# Altium PCB Taillight.PcbDoc
Units mil, origin at the board's own origin, x right, y up, seen from the top; angles counter-clockwise.
Board outline 3819 x 1417.5 mil, 2 copper layers (Top Layer, Bottom Layer), stack 61.8 mil thick; 20 components, 18 nets, 46 pads, 8 vias.
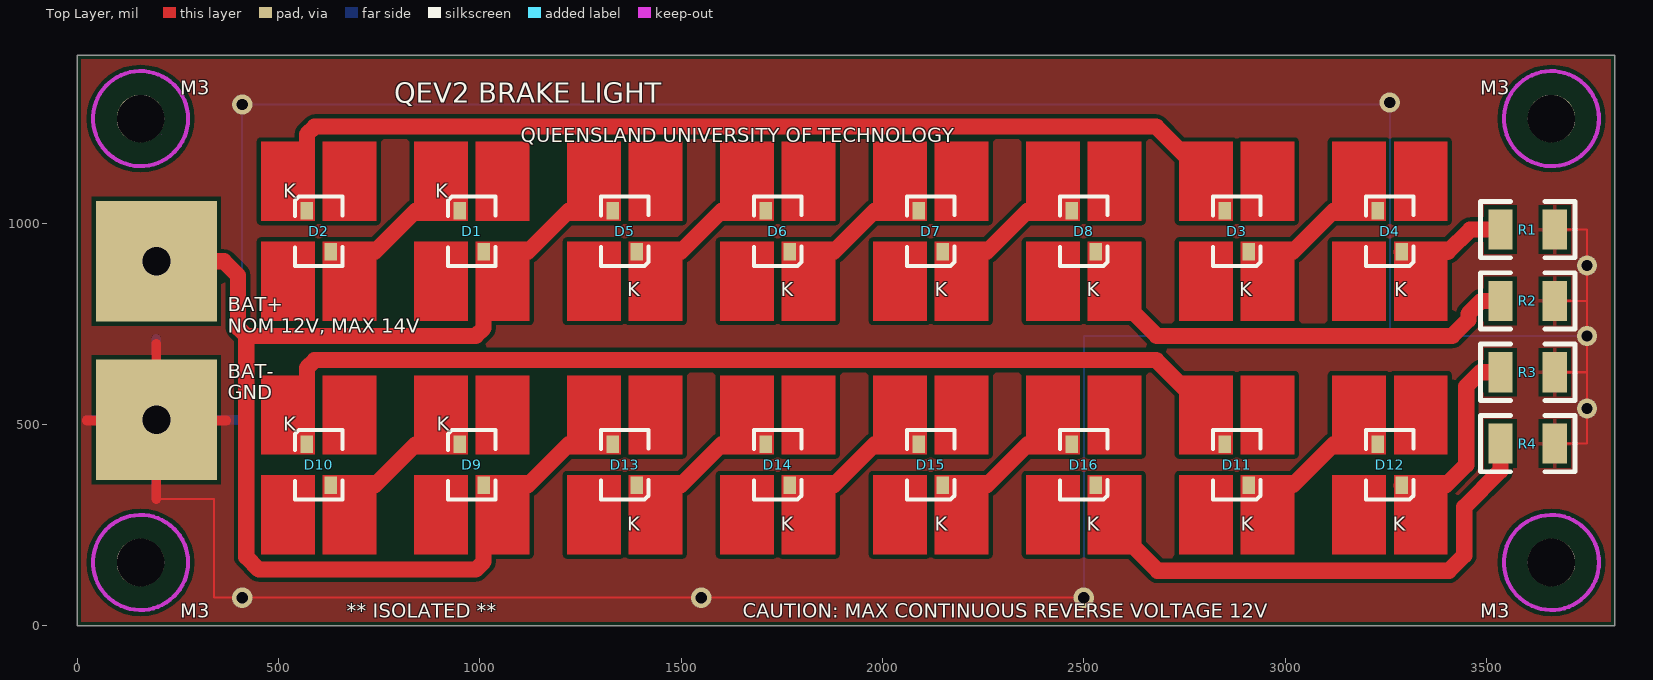
[diagram p0: Top Layer view]
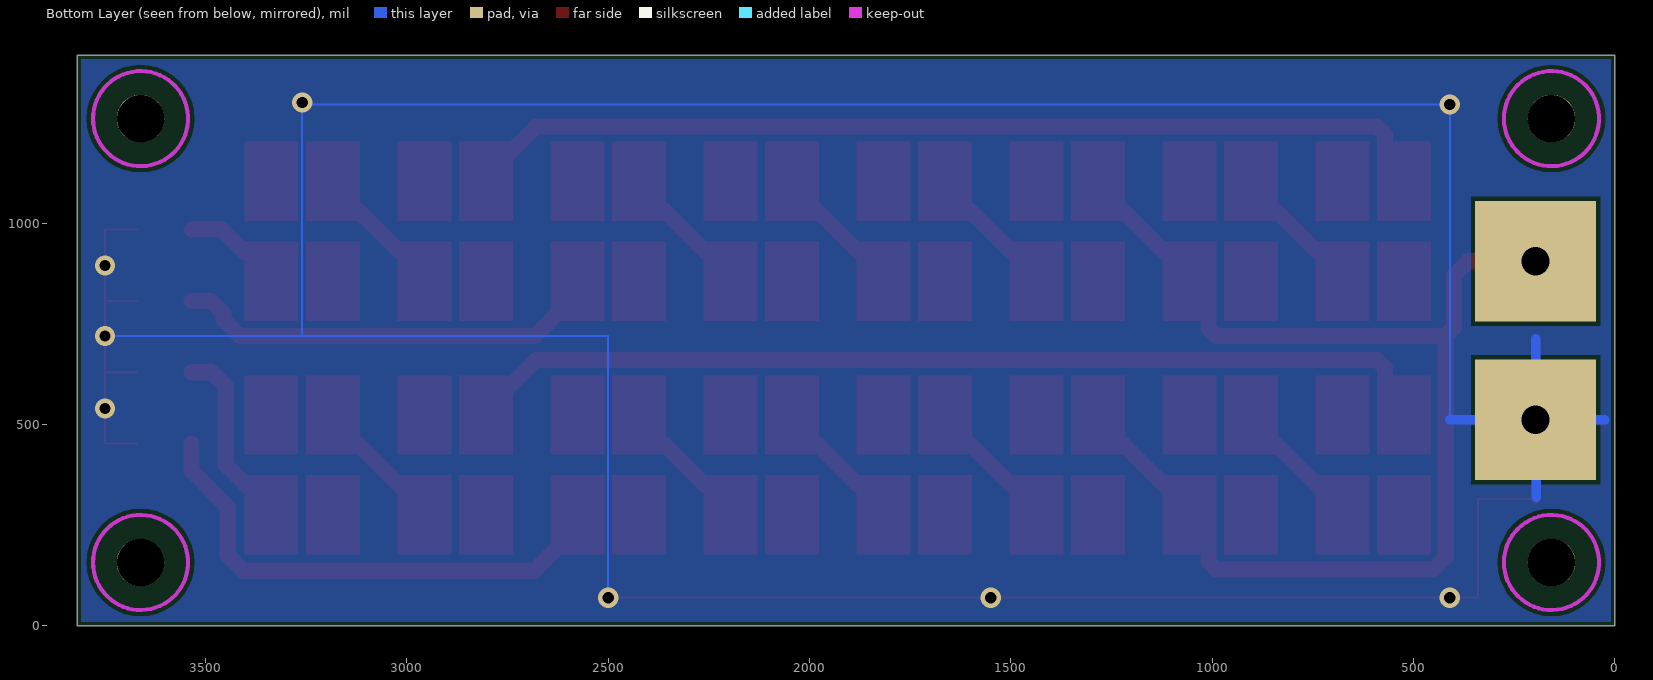
[diagram p1: Bottom Layer view, seen from below]
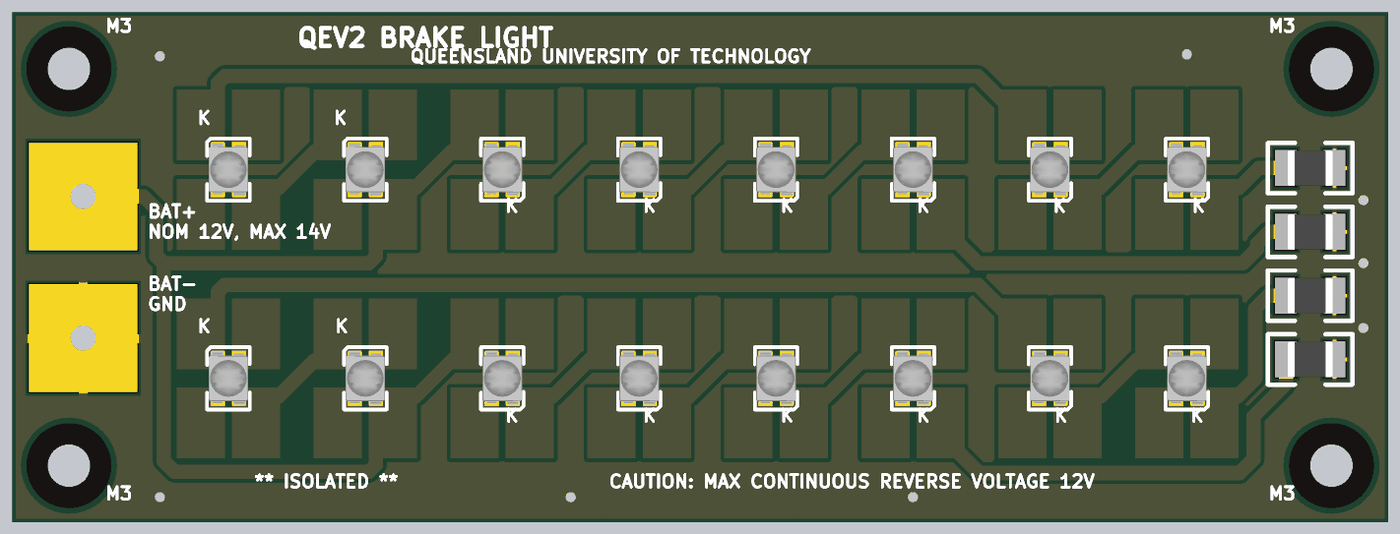
[diagram p2: 3D render of the assembled board from above, using the file's embedded part models]

## Layer stack, top to bottom
Top Solder: solder mask 0.4, Solder Resist, Dk 3.5
Top Layer: signal copper 1.4
Dielectric 1: core 59, Core-043, Dk 4.3
Bottom Layer: signal copper 1.4
Bottom Solder: solder mask 0.4, Solder Resist, Dk 3.5

## Board outline
0,0 3819,0 3819,1417.5 0,1417.5
cut-out: 210,1219.96

## Design rules (kind name [scope] priority, off if disabled: settings)
BoardOutlineClearance [All] p1: gap=10 ignorepadtopadclearanceinfootprint=FALSE except(0: Arc-SplitContinuation Track-SplitContinuation SMDPad-SplitContinuation THPad-SplitContinuation Via-SplitContinuation Fill-SplitContinuation Poly-SplitContinuation Region-SplitContinuation Text-SplitContinuation)
Clearance [All] p1: gap=10 ignorepadtopadclearanceinfootprint=FALSE except(0: Arc-Hole Track-Hole SMDPad-Hole THPad-Hole Via-Hole Fill-Hole Poly-Hole Region-Hole Text-Hole)
HoleSize [All] p1: absolutevalues=TRUE maxlimit=120 minlimit=1 maxpercent=80.000 minpercent=20.000
PolygonConnect PolygonConnect_1 [All] p1: thpad.connectstyle=Relief thpad.reliefconductorwidth=10 thpad.reliefentries=4 thpad.polygonreliefangle="90 Angle" thpad.airgapwidth=10 smdpad.connectstyle=Relief smdpad.reliefconductorwidth=10 smdpad.reliefentries=4 smdpad.polygonreliefangle="90 Angle" smdpad.airgapwidth=10 via.connectstyle=Direct via.reliefconductorwidth=10 via.reliefentries=4 via.polygonreliefangle="90 Angle" via.airgapwidth=10
PolygonConnect [All] p2: connectstyle=Relief reliefconductorwidth=10 reliefentries=4 polygonreliefangle="90 Angle" airgapwidth=10
RoutingVias [All] p1: holewidth=28 width=50 viastyle="Through Hole" minholewidth=28 minwidth=50 maxholewidth=28 maxwidth=50
SilkToSilkClearance [All] p1 off: silktosilkclearance=10
SilkToSolderMaskClearance [IsPad] p1 off: minsilkscreentomaskgap=10 clearancetoexposedcopper=TRUE
SolderMaskExpansion [All] p1: expansion=4 istentingtop=FALSE
Width Power [InNet('+12V')] p1: maxlimit=100 minlimit=24 preferedwidth=60 minimp=50.000000 maximp=50.000000 favimp=50.000000
Width Ground [InNet('GND')] p2: maxlimit=100 minlimit=5 preferedwidth=5 minimp=50.000000 maximp=50.000000 favimp=50.000000
Width [All] p3: maxlimit=60 minlimit=24 preferedwidth=40 minimp=50.000000 maximp=50.000000 favimp=50.000000
27 further rules are at their usual default settings.

## Classes and differential pairs
component class Taillight: D1 D2 D3 D4 D5 D6 D7 D8 D9 D10 D11 D12 D13 D14 D15 D16

## Components (designator, comment, footprint, x,y, rotation, side; value= is the part's Value field where it differs from the comment)
D1 "LED1" PLCC-4-1-LED 980,980 r180 top
D2 "LED1" PLCC-4-1-LED 600,980 r180 top
D3 "LED1" PLCC-4-1-LED 2880,980 r0 top
D4 "LED1" PLCC-4-1-LED 3260,980 r0 top
D5 "LED1" PLCC-4-1-LED 1360,980 r0 top
D6 "LED1" PLCC-4-1-LED 1740,980 r0 top
D7 "LED1" PLCC-4-1-LED 2120,980 r0 top
D8 "LED1" PLCC-4-1-LED 2500,980 r0 top
D9 "LED1" PLCC-4-1-LED 980,400 r180 top
D10 "LED1" PLCC-4-1-LED 600,400 r180 top
D11 "LED1" PLCC-4-1-LED 2880,400 r0 top
D12 "LED1" PLCC-4-1-LED 3260,400 r0 top
D13 "LED1" PLCC-4-1-LED 1360,400 r0 top
D14 "LED1" PLCC-4-1-LED 1740,400 r0 top
D15 "LED1" PLCC-4-1-LED 2120,400 r0 top
D16 "LED1" PLCC-4-1-LED 2500,400 r0 top
R1 "Comment" 1210 3602.36,984.25 r0 top
R2 "Comment" 1210 3602.36,807.09 r0 top
R3 "Comment" 1210 3602.36,629.92 r0 top
R4 "Comment" 1210 3602.36,452.76 r0 top

## Footprints (in the part's own frame and the unit in brackets; to place one, negate y for a bottom-side part, rotate by r counter-clockwise, add the part's x,y. Pads: shape width x height; smd on the part's side, far side on the other; paste and mask are expansions set on the pad)
1210 [mil]
  rect 60x100 smd: 1(-67.5,0) 2(67.5,0)
  silkscreen extent -118,-70 118,70, body extent -63,-49 63,49, height 30
PLCC-4-1-LED [mm]
  rect 0.8x1.1 smd: 1(-0.75,1.3) 2(0.75,-1.3)
  Top Layer region: 3.65,-0.65 0.25,-0.65 0.25,-5.65 3.65,-5.65
  Top Layer region: -0.25,-0.65 -3.65,-0.65 -3.65,-5.65 -0.25,-5.65
  Top Layer region: -3.65,0.65 -0.25,0.65 -0.25,5.65 -3.65,5.65
  Top Layer region: 0.25,0.65 3.65,0.65 3.65,5.65 0.25,5.65
  silkscreen extent -1.5,-2.2 1.5,2.2, body extent -1.4,-1.75 1.4,1.75, height 3.68

## Part data
D1 D2 D3 D4 D5 D6 D7 D8 D9 D10 D11 D12 D13 D14 D15 D16: "LS E63F-DBFA-1 Red Topled", LatestRevisionDate=08-Jul-2005, LatestRevisionNote="Mech Layer 1 removed.", PackageDescription="LED; 2 Leads", PackageReference=LED-1, Published=8-Jun-2000, Publisher="Altium Limited"
R1 R2 R3 R4: library part Res3, "Resistor"

## Free pads (board coordinates)
  rect 300x300 hole 70: 11(196.85,905.51) 12(196.85,511.81)
  round 118.11 hole 118.11 unplated mask+59.06: 12(157.48,157.48) 12(157.48,1259.84) 12(3661.42,157.48) 12(3661.42,1259.84)

## Via types
v1: diameter 50, hole 28, Top Layer to Bottom Layer, tented both sides, 8 vias

## Nets (pads, with @x,y where several pads share a name; then routed paths per layer and width w, separated by ;. In a path a pad name is that pad's centre, name@x,y a point inside that pad or via, vN(x,y) a via of type N, cw(c..) or ccw(c..) an arc to the next point about the centre after c; other vN are vias at no path point)
+12V: D1.1 D5.1 D9.1 D13.1 pad.11 | length 3238.2
  Top Layer w40: pad.11 364.49,905.51 400,870 400,740 420,720 ; D13.1 1221.18,451.18 1118.82,348.82 D9.1 1009.53,159.53 990,140 451.43,140 420,171.43 420,720 ; D5.1 1221.18,1031.18 1118.82,928.82 D1.1 1009.53,739.53 990,720 420,720
GND: pad.12@196.85,511.81 R1.2 R2.2 R3.2 R4.2 | length 11070.1
  Top Layer w5: 196.85,315 340,315 340,70 v1(410,70) v1(1550,70) v1(2500,70) ; R4.2 3750,452.76 v1(3750,540) 3750,630 ; R3.2 3749.92,629.92 3750,630 ; R2.2 3749.59,807.09 3750,807.5 ; R1.2 3750,984.25 v1(3750,895) 3750,807.5 ; 3750,630 v1(3750,720) 3750,807.5
  Top Layer w24: 23.7,510 pad.12@196.85,510 ; 196.85,315 pad.12@196.85,510 ; pad.12@196.85,511.81 196.85,700 ; 370,510 pad.12@196.85,510
  Bottom Layer w5: 410,511.81 v1(410,1295) 3255,1295 v1(3260,1300) 3260,720 ; v1(2500,70) 2500,720 3260,720 ; v1(3750,720) 3260,720
  Bottom Layer w24: 25,511.81 pad.12@195.04,511.81 ; 195.04,320 pad.12@195.04,511.81 ; pad.12@195.04,546.81 pad.12@195.04,511.81 ; pad.12@196.81,500 pad.12@196.81,511.81 ; 196.81,713.15 pad.12@196.81,511.81 ; pad.12@196.85,511.81 410,511.81 ; pad.12@195.04,511.81 pad.12@196.81,511.81
NetD1_2: D1.2 D2.1 | length 363.3
  Top Layer w40: D2.1 738.82,928.82 841.18,1031.18 D1.2
NetD2_2: D2.2 D3.1 | length 2586.3
  Top Layer w40: D2.2 570.47,1220.47 590,1240 2680,1240 2850.47,1069.53 D3.1
NetD3_2: D3.2 D4.1 | length 363.3
  Top Layer w40: D3.2 3018.82,928.82 3121.18,1031.18 D4.1
NetD4_2: D4.2 R1.1 | length 268.3
  Top Layer w40: D4.2 3403.82,928.82 3459.25,984.25 R1.1
NetD5_2: D5.2 D6.1 | length 363.3
  Top Layer w40: D5.2 1498.82,928.82 1601.18,1031.18 D6.1
NetD6_2: D6.2 D7.1 | length 363.3
  Top Layer w40: D6.2 1878.82,928.82 1981.18,1031.18 D7.1
NetD7_2: D7.2 D8.1 | length 363.3
  Top Layer w40: D7.2 2258.82,928.82 2361.18,1031.18 D8.1
NetD8_2: D8.2 R2.1 | length 1170.1
  Top Layer w40: D8.2 2529.53,871.73 2681.26,720 3415,720 3455,760 3455,775 3487.09,807.09 R2.1
NetD9_2: D9.2 D10.1 | length 362.4
  Top Layer w40: D10.1 738.82,348.82 840,450 D9.2@950,450
NetD10_2: D10.2 D11.1 | length 2587.3
  Top Layer w40: D10.2 570.47,640.47 590,660 2680,660 2850,490 D11.1@2850,450
NetD11_2: D11.2 D12.1 | length 362.4
  Top Layer w40: D11.2@2910,350 3020,350 3121.18,451.18 D12.1
NetD12_2: D12.2 R3.1 | length 476
  Top Layer w40: D12.2 3398.82,348.82 3450,400 3450,595 3484.92,629.92 R3.1
NetD13_2: D13.2 D14.1 | length 363.3
  Top Layer w40: D13.2 1498.82,348.82 1601.18,451.18 D14.1
NetD14_2: D14.2 D15.1 | length 363.3
  Top Layer w40: D14.2 1878.82,348.82 1981.18,451.18 D15.1
NetD15_2: D15.2 D16.1 | length 363.3
  Top Layer w40: D15.2 2258.82,348.82 2361.18,451.18 D16.1
NetD16_2: D16.2 R4.1 | length 1368.2
  Top Layer w40: D16.2 2529.53,290.47 2683.15,136.85 3406.85,136.85 3445,175 3445,295 3534.86,384.86 R4.1

## Polygon pours and split planes (outlines as drawn)
GND on Bottom Layer "GND_L02_P008" (solid, remove dead copper, pour order 8): 0,0 0,1417.32 3818.9,1417.32 3818.9,0
GND on Top Layer "GND_L01_P000" (solid, remove dead copper, pour order 0): 0,0 0,1417.32 3818.9,1417.32 3818.9,0

## Keep-outs
Keep-Out Layer:
  circle w10: c157.48,157.48 r118.11
  circle w10: c157.48,1259.84 r118.11
  circle w10: c3661.42,1259.84 r118.11
  circle w10: c3661.42,157.48 r118.11

## Silkscreen, mask and mechanical layers (free items; w line width, h text height)
Top Overlay:
  text "M3" at 255.91,1318.9 h35
  text "M3" at 3484.25,1318.9 h35
  text "QEV2 BRAKE LIGHT" at 787.4,1299.21 h50
  text "QUEENSLAND UNIVERSITY OF TECHNOLOGY" at 1102.36,1200.79 h35
  text "K" at 511.81,1062.99 h35
  text "K" at 889.76,1062.99 h35
  text "K" at 1366.14,818.9 h35
  text "K" at 1748.03,818.9 h35
  text "K" at 2129.92,818.9 h35
  text "K" at 2507.87,818.9 h35
  text "K" at 2885.83,818.9 h35
  text "K" at 3271.65,818.9 h35
  text "BAT+ / NOM 12V, MAX 14V" at 374.02,728.35 h35
  text "BAT- / GND" at 374.02,562.99 h35
  text "K" at 511.81,484.25 h35
  text "K" at 893.7,484.25 h35
  text "K" at 1366.14,236.22 h35
  text "K" at 1748.03,236.22 h35
  text "K" at 2129.92,236.22 h35
  text "K" at 2507.87,236.22 h35
  text "K" at 2889.76,236.22 h35
  text "K" at 3267.72,236.22 h35
  text "M3" at 255.91,19.68 h35
  text "** ISOLATED **" at 669.29,19.68 h35
  text "CAUTION: MAX CONTINUOUS REVERSE VOLTAGE 12V" at 1653.54,19.68 h35
  text "M3" at 3484.25,19.68 h35
BoardOutline:
  the board outline again, w10
Mechanical 15:
  the board outline again, w5

## Dimensions
0,1417.5 to 3819,1417.5 on Dimensions
0,0 to 0,1417.5 on Dimensions
157.48,157.48 to 3661.42,157.48 on Dimensions
3661.42,1259.84 to 3661.42,157.48 on Dimensions